# EAGLE board mp_rair (EAGLE 6.3)
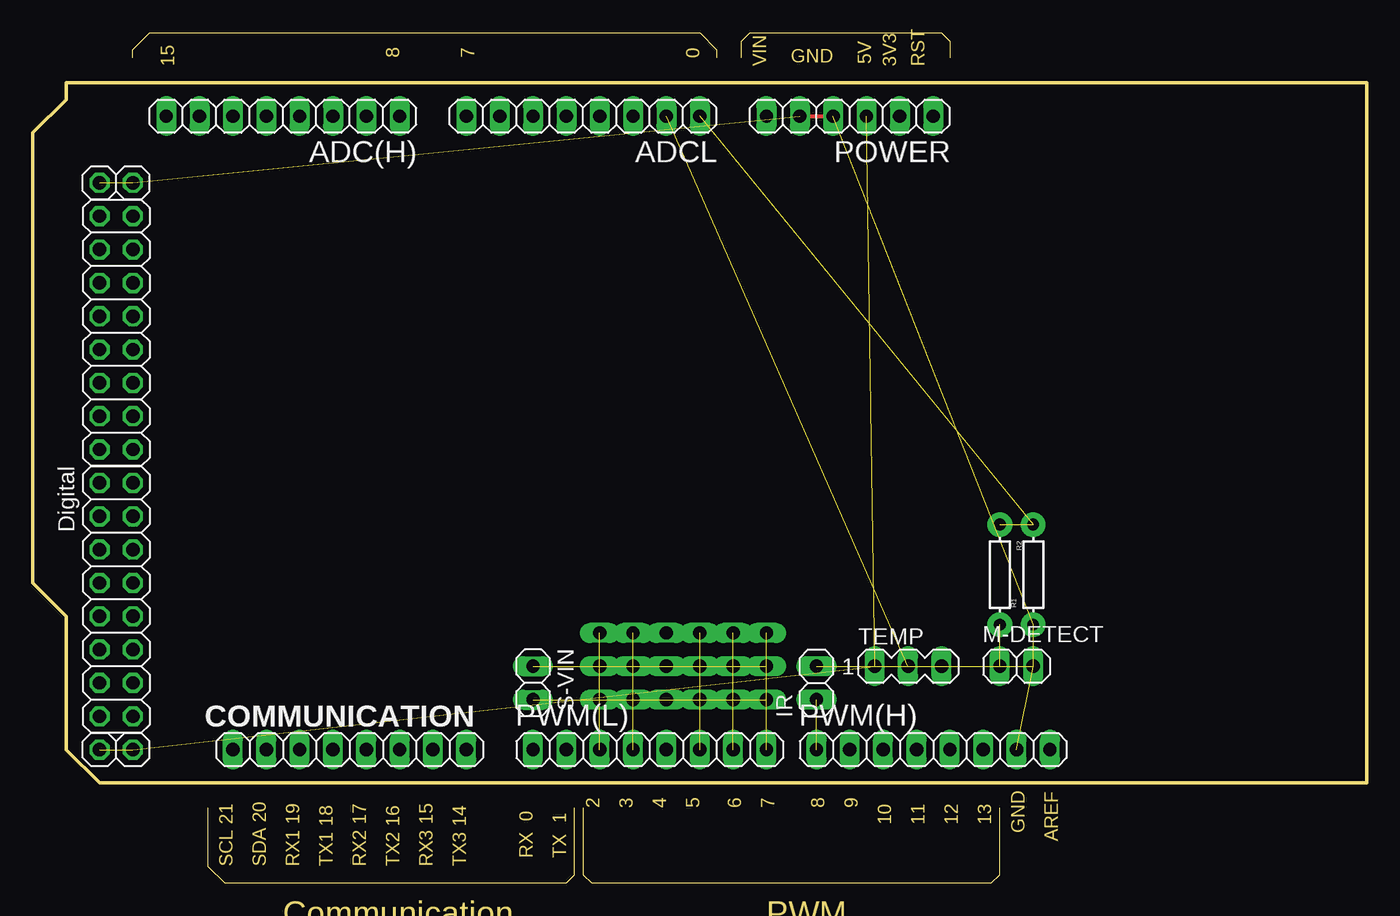
[diagram p0: board, top side]
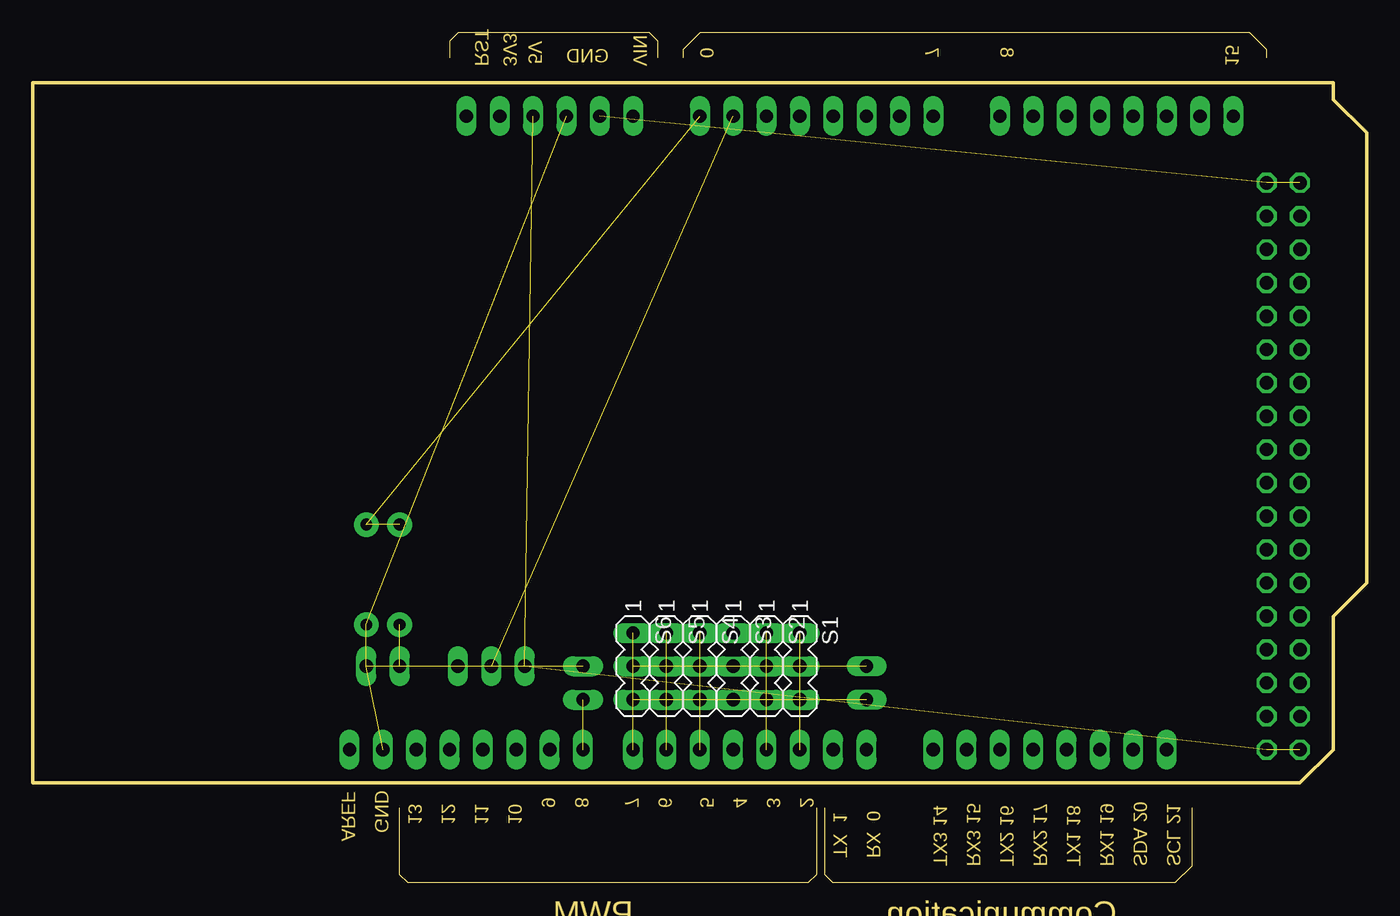
[diagram p1: board, bottom side, seen from below]

Size 101.6 x 64.77 mm. Coordinates in mm from the lower left corner, seen from the top.
Outline: 7.62,62.87 7.62,63.5 8.89,64.77 50.8,64.77 52.07,63.5 52.07,62.87
Outline: 53.98,62.87 53.98,64.13 54.61,64.77 69.22,64.77 69.85,64.13 69.85,62.87
Outline: 13.34,5.71 13.34,1.27 14.61,0 40.64,0 41.27,0.64 41.27,5.71
Outline: 41.91,5.71 41.91,0.64 42.55,0 73.03,0 73.66,0.64 73.66,5.71
Outline: 101.6,7.62 5.08,7.62 2.54,10.16 2.54,20.32 0,22.86 0,57.15 2.54,59.69 2.54,60.96 101.6,60.96 101.6,7.62
Copper layers (1*16): Top 0.035mm / dielectric 1.5mm / Bottom 0.035mm
Design rules "default *": minimum track width 8mil, minimum drill 16mil, track to track 8mil, track to pad 8mil, pad to pad 8mil, via to via 10mil, smd to smd 8mil, copper to edge 40mil, drill to drill 12mil, minimum pad ring 10mil, minimum via ring 10mil, stop-mask expansion 4mil, vias tented up to drill 0mil, thermal gap 10mil
Net classes: 1 power: width 0.762 mm, drill 0.711 mm, clearance 0.203 mm; 2 gnd: width 0.762 mm, drill 0.711 mm, clearance 0.203 mm; 3 usbvcc: width 0.508 mm, drill 0.711 mm, clearance 0.203 mm

## Footprints (pad centres in the part's own frame; a part is rotated, then mirrored left to right if it is on the bottom)
1X08 = drill 1.016 long: 1 -8.89,0; 2 -6.35,0; 3 -3.81,0; 4 -1.27,0; 5 1.27,0; 6 3.81,0; 7 6.35,0; 8 8.89,0
MA04-1 = drill 1.016 long: 1 -3.81,0; 2 -1.27,0; 3 1.27,0; 4 3.81,0
1X02 = drill 1.016 long: 1 -1.27,0; 2 1.27,0
2X08 = drill 1.016 octagon: 1 -8.89,-1.27; 2 -8.89,1.27; 3 -6.35,-1.27; 4 -6.35,1.27; 5 -3.81,-1.27; 6 -3.81,1.27; 7 -1.27,-1.27; 8 -1.27,1.27; 9 1.27,-1.27; 10 1.27,1.27; 11 3.81,-1.27; 12 3.81,1.27; 13 6.35,-1.27; 14 6.35,1.27; 15 8.89,-1.27; 16 8.89,1.27
1X01 = drill 1.016 octagon: 1 0,0
1X06 = drill 1.016 long: 1 -6.35,0; 2 -3.81,0; 3 -1.27,0; 4 1.27,0; 5 3.81,0; 6 6.35,0
AXIAL-0.3 = drill 0.9 pad 1.88: P$1 -3.81,0; P$2 3.81,0
MA03-1 = drill 1.016 long: 1 -2.54,0; 2 0,0; 3 2.54,0

## Placement (x,y rotation side)
ADC(H)  [1X08]  19.05,58.42 180 top
ADCL  [1X08]  41.91,58.42 180 top
COMMUNICATION  [1X08]  24.13,10.16 0 top
GPS  [MA04-1]  -13.34,-21.59 0 bottom  (outside the outline)
IR  [1X02]  59.69,15.24 90 top
JP1  Digital  [2X08]  6.35,21.59 270 top
JP2  Digital  [2X08]  6.35,41.91 270 top
JP3  [1X01]  7.62,10.16 180 top
JP4  [1X01]  5.08,10.16 180 top
JP5  [1X01]  7.62,53.34 180 top
JP6  [1X01]  5.08,53.34 180 top
M-DETECT  [1X02]  74.93,16.51 0 top
POWER  [1X06]  62.23,58.42 180 top
PWM(H)  [1X08]  68.58,10.16 0 top
PWM(L)  [1X08]  46.99,10.16 0 top
R1  [AXIAL-0.3]  76.2,23.5 90 top
R2  [AXIAL-0.3]  73.66,23.5 270 top
S1  [MA03-1]  43.18,16.51 270 bottom
S2  [MA03-1]  45.72,16.51 270 bottom
S3  [MA03-1]  48.26,16.51 270 bottom
S4  [MA03-1]  50.8,16.51 270 bottom
S5  [MA03-1]  53.34,16.51 270 bottom
S6  [MA03-1]  55.88,16.51 270 bottom
S-VIN  [1X02]  38.1,15.24 270 top
TEMP  [MA03-1]  66.67,16.51 0 top

## Library data of the parts
ADC(H) ADCL COMMUNICATION IR JP1-JP6 M-DETECT POWER PWM(H) PWM(L) S-VIN = pinhead
GPS S1-S6 TEMP = con-lstb; OC_FARNELL: unknown; OC_NEWARK: unknown
R1 R2 = SparkFun-Passives

## Nets
+3V3 [power]: POWER.2
+5V [usbvcc]: JP3.1 JP4.1 POWER.3 TEMP.1
ADC0: ADCL.1 R1.P$2 R2.P$1
ADC1: ADCL.2 TEMP.2
ADC2: ADCL.3
ADC3: ADCL.4
ADC4: ADCL.5
ADC5: ADCL.6
ADC6: ADCL.7
ADC7: ADCL.8
ADC8: ADC(H).1
ADC9: ADC(H).2
ADC10: ADC(H).3
ADC11: ADC(H).4
ADC12: ADC(H).5
ADC13: ADC(H).6
ADC14: ADC(H).7
ADC15: ADC(H).8
AREF: PWM(H).8
DIG22: JP1.16
DIG23: JP1.15
DIG24: JP1.14
DIG25: JP1.13
DIG26 [gnd]: JP1.12
DIG27: JP1.11
DIG28: JP1.10
DIG29: JP1.9
DIG30: JP1.8
DIG31: JP1.7
DIG32: JP1.6
DIG33: JP1.5
DIG34: JP1.4
DIG35: JP1.3
DIG36: JP1.2
DIG37: JP1.1
DIG38: JP2.16
DIG39: JP2.15
DIG40: JP2.14
DIG41: JP2.13
DIG42: JP2.12
DIG43: JP2.11
DIG44: JP2.10
DIG45: JP2.9
DIG46: JP2.8
DIG47: JP2.7
DIG48: JP2.6
DIG49: JP2.5
DIG50: JP2.4
DIG51: JP2.3
DIG52: JP2.2
DIG53: JP2.1
GND [gnd]: IR.2 JP5.1 JP6.1 M-DETECT.2 POWER.4 POWER.5 PWM(H).7 R1.P$1 TEMP.3
N$1: S1.3 S2.3 S3.3 S4.3 S5.3 S6.3 S-VIN.2
N$2: S1.2 S2.2 S3.2 S4.2 S5.2 S6.2 S-VIN.1
N$3: M-DETECT.1 R2.P$2
N$6: S3.1
PWM00: PWM(L).1
PWM01: PWM(L).2
PWM02: PWM(L).3 S1.1
PWM03: PWM(L).4 S2.1
PWM04: PWM(L).5
PWM05: PWM(L).6 S4.1
PWM06: PWM(L).7 S5.1
PWM07: PWM(L).8 S6.1
PWM08: IR.1 PWM(H).1
PWM09: PWM(H).2
PWM10: PWM(H).3
PWM11: PWM(H).4
PWM12: PWM(H).5
PWM13: PWM(H).6
RESET: POWER.1
RX1_D19: COMMUNICATION.3
RX2_D17: COMMUNICATION.5
RX3_D15: COMMUNICATION.7
RX4_D14: COMMUNICATION.8
SCL_D21: COMMUNICATION.1
SDA_D20: COMMUNICATION.2
TX1_D18: COMMUNICATION.4
TX2_D16: COMMUNICATION.6
VIN [power]: POWER.6

## Tracks (layer width: path | path; a pad name or v marks a point on that pad's centre or on a via)
+5V  (3 unrouted)
ADC0  (2 unrouted)
ADC1  (1 unrouted)
GND  (7 unrouted)
  Top 0.305: POWER.5 POWER.4
N$1  (6 unrouted)
N$2  (6 unrouted)
N$3  (1 unrouted)
PWM02  (1 unrouted)
PWM03  (1 unrouted)
PWM05  (1 unrouted)
PWM06  (1 unrouted)
PWM07  (1 unrouted)
PWM08  (1 unrouted)

## Text on the board
Dimension: 5V | 3V3 | GND | 15 | 8 | 7 | 0 | VIN | RST | 2 | 3 | 4 | 5 | 6 | 7 | 8 | 9 | 10 | 11 | 12 | 13 | GND | AREF | SCL 21 | SDA 20 | RX1 19 | TX1 18 | RX2 17 | TX2 16 | RX3 15 | TX3 14 | RX 0 | TX 1 | Communication | PWM
tOrigins: Analog In | Power